# Altium PCB RFID-Project-PCB.PcbDoc
Units mm, origin at the board's own origin, x right, y up, seen from the top; angles counter-clockwise.
Board outline 152.4 x 101.6 mm, 2 copper layers (Top Layer, Bottom Layer); 83 components, 54 nets, 278 pads, 0 vias.
Unrouted connection lines stored in the file: 173.
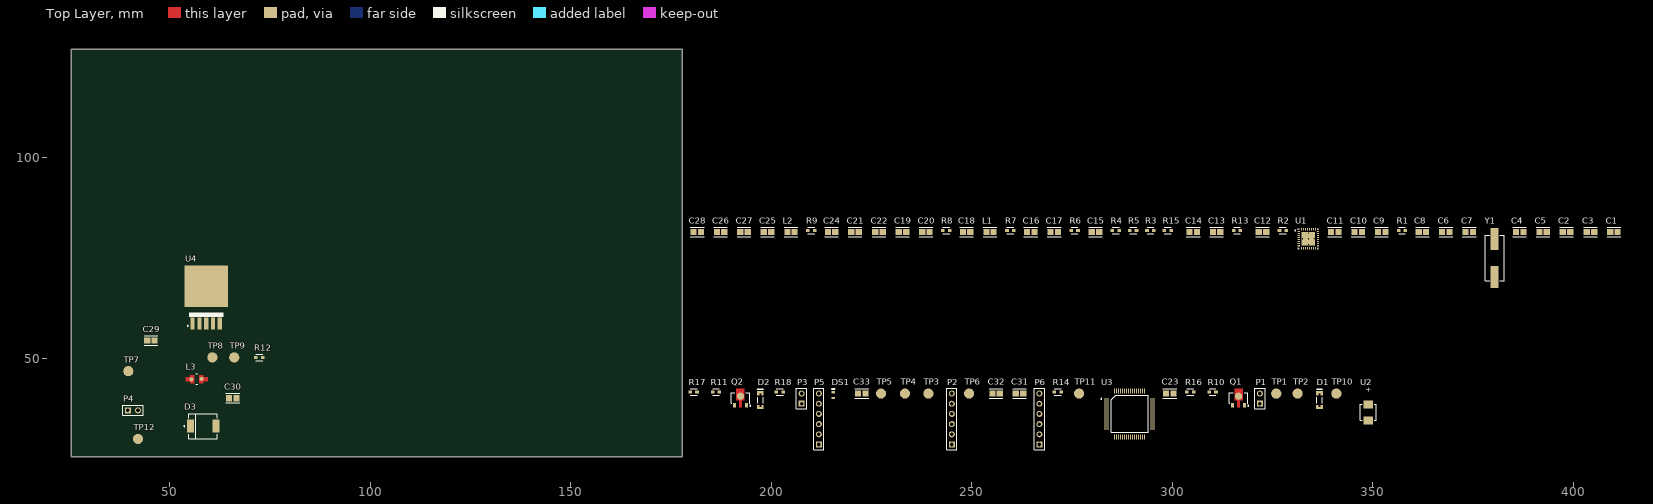
[diagram p0: Top Layer view]
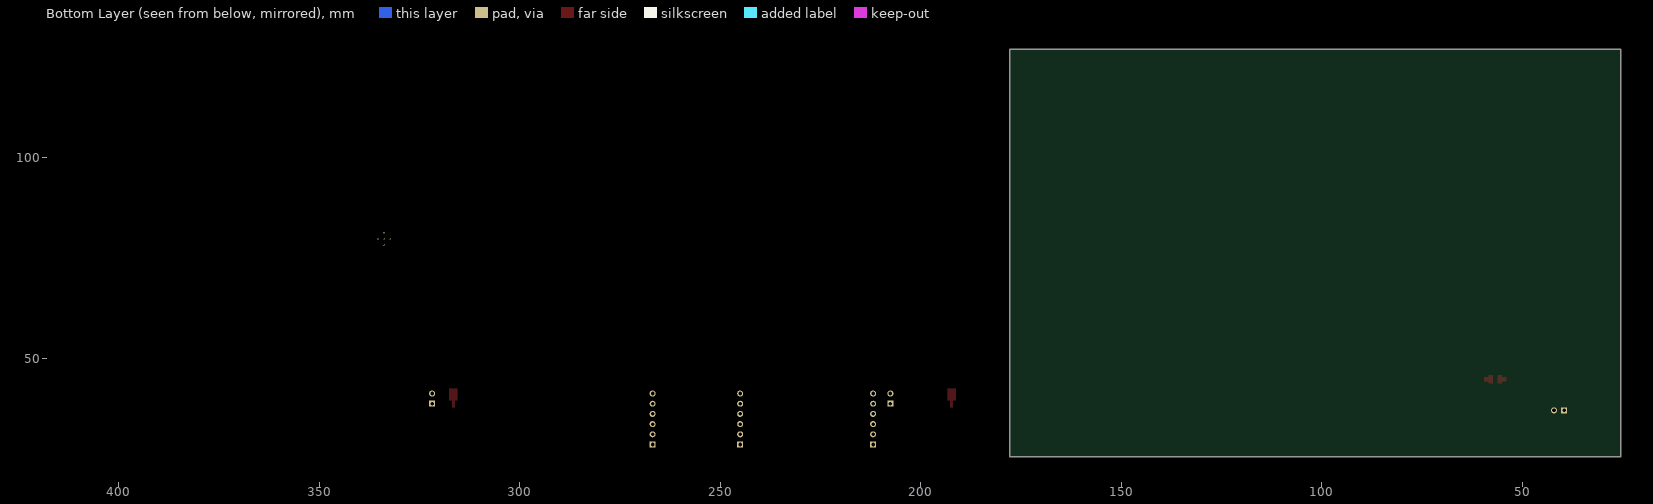
[diagram p1: Bottom Layer view, seen from below]

## Layer stack, top to bottom
Top Solder: solder mask 0.0102, Solder Resist, Dk 3.5
Top Layer: signal copper 0.0356
Dielectric 1: dielectric 0.32, FR-4, Dk 4.8
Bottom Layer: signal copper 0.0356
Bottom Solder: solder mask 0.0102, Solder Resist, Dk 3.5

## Board outline
25.4,25.4 177.8,25.4 177.8,127 25.4,127

## Design rules (kind name [scope] priority, off if disabled: settings)
Clearance [All] p1: gap=0.254 ignorepadtopadclearanceinfootprint=FALSE except(0: Arc-Hole Track-Hole SMDPad-Hole THPad-Hole Via-Hole Fill-Hole Poly-Hole Region-Hole Text-Hole; 0.125: Arc-Arc Arc-Track Arc-SMDPad Arc-THPad Track-Track Track-SMDPad Track-THPad SMDPad-SMDPad SMDPad-THPad; 0.15: Arc-Fill Arc-Poly Arc-Region Track-Fill Track-Poly Track-Region)
PolygonConnect [All] p1: connectstyle=Relief reliefconductorwidth=0.254 reliefentries=4 polygonreliefangle="90 Angle" airgapwidth=0.254
RoomDefinition MCU [InComponentClass('MCU')] p1: confinementstyle=ConfineIn formatcopy=TRUE lockcomponents=FALSE outline 178.943,26.924 351.282,26.924 351.282,45.212 178.943,45.212
RoomDefinition RFID [InComponentClass('RFID')] p2: confinementstyle=ConfineIn formatcopy=TRUE lockcomponents=FALSE outline 178.943,66.929 412.623,66.929 412.623,85.471 178.943,85.471
RoutingVias [All] p1: holewidth=0.711 width=1.27 viastyle="Through Hole" minholewidth=0.711 minwidth=1.27 maxholewidth=0.711 maxwidth=1.27
SolderMaskExpansion [All] p1: expansion=0.102 istentingtop=FALSE
Width [All] p1: maxlimit=0.254 minlimit=0.254 preferedwidth=0.254
30 further rules are at their usual default settings.

## Classes and differential pairs
component class RFID: C1 C2 C3 C4 C5 C6 C7 C8 C9 C10 C11 C12 C13 C14 C15 C16 C17 C18 C19 C20 C21 C22 C24 C25 C26 C27 C28 L1 L2 R1 R2 R3 R4 R5 R6 R7 R8 R9 R13 R15 U1 Y1
component class Power: C29 C30 D3 L3 P4 R12 TP7 TP8 TP9 TP12 U4
component class MCU: C23 C31 C32 C33 D1 D2 DS1 P1 P2 P3 P5 P6 Q1 Q2 R10 R11 R14 R16 R17 R18 TP1 TP2 TP3 TP4 TP5 TP6 TP10 TP11 U2 U3

## Components (designator, comment, footprint, x,y, rotation, side; value= is the part's Value field where it differs from the comment)
C1 "10nF" FP-GCJ21B-0_3-IPC_A 410.083,81.407 r0 top
C2 "2.2uF" FP-GCJ21B-0_3-IPC_A 398.272,81.407 r0 top
C3 "27pF" FP-GCJ21B-0_3-IPC_A 404.241,81.407 r0 top
C4 "10nF" FP-GCJ21B-0_3-IPC_A 386.588,81.407 r0 top
C5 "10nF" FP-GCJ21B-0_3-IPC_A 392.43,81.407 r0 top
C6 "27pF" FP-GCJ21B-0_3-IPC_A 368.173,81.407 r0 top
C7 "10nF" FP-GCJ21B-0_3-IPC_A 374.015,81.407 r0 top
C8 "10nF" FP-GCJ21B-0_3-IPC_A 362.331,81.407 r0 top
C9 "2.2uF" FP-GCJ21B-0_3-IPC_A 352.171,81.407 r0 top
C10 "2.2uF" FP-GCJ21B-0_3-IPC_A 346.329,81.407 r0 top
C11 "0.1uF" FP-GCJ21B-0_3-IPC_A 340.487,81.407 r0 top
C12 "10nF" FP-GCJ21B-0_3-IPC_A 322.453,81.407 r0 top
C13 "2.2uF" FP-GCJ21B-0_3-IPC_A 311.023,81.407 r0 top
C14 "10nF" FP-GCJ21B-0_3-IPC_A 305.181,81.407 r0 top
C15 "2.2uF" FP-GCJ21B-0_3-IPC_A 280.797,81.407 r0 top
C16 "1500pF" FP-GCJ21B-0_3-IPC_A 264.668,81.407 r0 top
C17 "1500pF" FP-GCJ21B-0_3-IPC_A 270.51,81.407 r0 top
C18 "47pF" FP-GCJ21B-0_3-IPC_A 248.666,81.407 r0 top
C19 "1200pF" FP-GCJ21B-0_3-IPC_A 232.664,81.407 r0 top
C20 "1200pF" FP-GCJ21B-0_3-IPC_A 238.506,81.407 r0 top
C21 "680pF" FP-GCJ21B-0_3-IPC_A 220.853,81.407 r0 top
C22 "10pF" FP-GCJ21B-0_3-IPC_A 226.822,81.407 r0 top
C23 "100nF" FP-GCJ21B-0_3-IPC_A 299.339,41.148 r0 top
C24 "56pF" FP-GCJ21B-0_3-IPC_A 215.011,81.407 r0 top
C25 "10pF" FP-GCJ21B-0_3-IPC_A 199.009,81.407 r0 top
C26 "220pF" FP-GCJ21B-0_3-IPC_A 187.325,81.407 r0 top
C27 "680pF" FP-GCJ21B-0_3-IPC_A 193.167,81.407 r0 top
C28 "100pF" FP-GCJ21B-0_3-IPC_A 181.483,81.407 r0 top
C29 "100uF" FP-GCJ21B-0_3-IPC_A 45.248,54.356 r180 top
C30 "1000uF" FP-GCJ21B-0_3-IPC_A 65.659,40.005 r0 top
C31 "100nF" FP-GCJ21B-0_3-IPC_A 261.874,41.148 r0 top
C32 "100nF" FP-GCJ21B-0_3-IPC_A 256.032,41.148 r0 top
C33 "100nF" FP-GCJ21B-0_3-IPC_A 222.504,41.148 r0 top
D1 "LL4148" FAIR-SOD80-2_V 336.677,39.497 r90 top
D2 "LL4148" FAIR-SOD80-2_V 197.231,39.497 r90 top
D3 "SS34-E3/57T" FP-95402-MFG 58.293,33.02 r0 top
DS1 "TLMS1000-GS08" VISH-TLMS1000_V 215.392,40.767 r90 top
L1 "LQM21NNR33K10D" FP-LQM21DN_00-IPC_A 254.508,81.407 r0 top
L2 "LQM21NNR33K10D" FP-LQM21DN_00-IPC_A 204.851,81.407 r0 top
L3 "LQH32CN101K23L" FP-LQH32CH_23-MFG 56.684,44.766 r0 top
P1 "Header 2" HDR1X2 321.818,38.608 r90 top
P2 "Header 6" HDR1X6 244.983,28.448 r90 top
P3 "Header 2" HDR1X2 207.518,38.608 r90 top
P4 "Header 2" HDR1X2 39.497,36.957 r0 top
P5 "Header 6" HDR1X6 211.836,28.448 r90 top
P6 "Header 6" HDR1X6 266.827,28.448 r90 top
Q1 "PBHV8115X,115" FP-SOT89-MFG 316.484,40.005 r0 top
Q2 "PBHV8115X,115" FP-SOT89-MFG 192.278,40.005 r0 top
R1 "10k" FP-AC0603-MFG 357.251,81.788 r0 top value=60.4Ω
R2 "100" FP-AC0603-MFG 327.533,81.788 r0 top value=60.4Ω
R3 "1k" FP-AC0603-MFG 294.513,81.788 r0 top value=60.4Ω
R4 "1k" FP-AC0603-MFG 285.877,81.788 r0 top value=60.4Ω
R5 "10k" FP-AC0603-MFG 290.195,81.788 r0 top value=60.4Ω
R6 "10k" FP-AC0603-MFG 275.59,81.788 r0 top value=60.4Ω
R7 "1k" FP-AC0603-MFG 259.588,81.788 r0 top value=60.4Ω
R8 "0" FP-AC0603-MFG 243.586,81.788 r0 top value=60.4Ω
R9 "1k" FP-AC0603-MFG 209.931,81.788 r0 top value=60.4Ω
R10 "220" FP-AC0603-MFG 310.007,41.529 r0 top value=60.4Ω
R11 "220" FP-AC0603-MFG 186.182,41.529 r0 top value=60.4Ω
R12 "0" FP-AC0603-MFG 72.263,50.165 r0 top value=60.4Ω
R13 "0" FP-AC0603-MFG 316.103,81.788 r0 top value=60.4Ω
R14 "0" FP-AC0603-MFG 271.399,41.529 r0 top value=60.4Ω
R15 "100k" FP-AC0603-MFG 298.831,81.788 r0 top value=60.4Ω
R16 "100k" FP-AC0603-MFG 304.419,41.529 r0 top value=60.4Ω
R17 "100k" FP-AC0603-MFG 180.594,41.529 r0 top value=60.4Ω
R18 "1K" FP-AC0603-MFG 202.057,41.529 r0 top value=60.4Ω
TP1 "testpoint" Testpoint 325.882,41.148 r0 top
TP2 "testpoint" Testpoint 331.216,41.148 r0 top
TP3 "testpoint" Testpoint 239.141,41.148 r0 top
TP4 "testpoint" Testpoint 233.299,41.148 r0 top
TP5 "testpoint" Testpoint 227.33,41.148 r0 top
TP6 "testpoint" Testpoint 249.301,41.148 r0 top
TP7 "testpoint" Testpoint 39.624,46.736 r0 top
TP8 "testpoint" Testpoint 60.579,50.165 r0 top
TP9 "testpoint" Testpoint 66.04,50.165 r0 top
TP10 "testpoint" Testpoint 340.868,41.148 r90 top
TP11 "testpoint" Testpoint 276.733,41.148 r90 top
TP12 "testpoint" Testpoint 42.037,29.845 r90 top
U1 "TRF7960RHBT" IC_ADS125H01IRHBT 333.883,79.756 r0 top
U2 "Buzzer" CUI_CMT-4023S-SMT-TR 348.869,36.449 r90 top
U3 "STM32L451RCT6" LQFP-64 289.306,36.068 r0 top
U4 "LM2576D2TR4-3.3G" D2PAK-5 59.055,63.119 r90 top
Y1 "ECS-135.600-CDX-0374" XTAL_ECS-135.600-CDX-0374 380.365,74.93 r90 top

## Footprints (in the part's own frame and the unit in brackets; to place one, negate y for a bottom-side part, rotate by r counter-clockwise, add the part's x,y. Pads: shape width x height; smd on the part's side, far side on the other; paste and mask are expansions set on the pad)
CUI_CMT-4023S-SMT-TR [mm]
  rect 2x2.4 smd: N(-2,0) P(2,0)
  silkscreen extent -2,-2 2,2, body extent -2,-2 2,2, height 2
D2PAK-5 [mil]
  rect 118.11x42 smd: 1(-178,134) 2(-178,67) 3(-178,0) 4(-178,-67) 5(-178,-134)
  rect 409.84x425.2 smd: 6(189.37,0)
  silkscreen extent -205,-167 -74,185, body extent -159,-200 400,200, height 180
FAIR-SOD80-2_V [mm] "SOD, 2-Leads, Body 3.45x1.4mm"
  rect 0.6x1.65 smd: 1(-1.95,0) 2(1.95,0)
  rect 1.1x0.575 smd: 1(-1.7,-0.537) 1(-1.7,0.537) 2(1.7,-0.537) 2(1.7,0.537)
  silkscreen extent -0.75,-0.7 2.75,0.7, body extent -1.73,-0.7 1.73,0.7, height 2.1
FP-95402-MFG [mm]
  rect 1.72x3.2 smd paste+0 mask+0: 1(-3.205,0) 2(3.205,0)
  silkscreen extent -4.82,-3.11 3.55,3.11, body extent -4.17,-3.21 4.17,3.21, height 0.25
FP-AC0603-MFG [mm]
  rect 0.9x0.8 smd paste+0 mask+0: 1(-0.85,0) 2(0.85,0)
  silkscreen extent -0.85,-0.82 0.85,0.82, body extent -1.4,-0.55 1.4,0.55, height 0.25
FP-GCJ21B-0_3-IPC_A [mm]
  rect 1.553x1.556 smd paste+0 mask+0: 1(-0.925,0) 2(0.925,0)
  silkscreen extent -1.7,-1.18 1.7,1.18, body extent -2.2,-1.28 2.2,1.28, height 0.25
FP-LQH32CH_23-MFG [mm]
  round 0.995 smd paste+0 mask+0: 1(-1.312,-0.062)
  round 1.012 smd paste+0 mask+0: 2(1.212,0.062)
  Top Layer region: 0.65,-1 0.65,1 1.65,1 1.65,0.5 2.75,0.5 2.75,-0.5 1.65,-0.5 1.65,-1
  Top Layer region: -1.65,-1 -1.65,-0.5 -2.75,-0.5 -2.75,0.5 -1.65,0.5 -1.65,1 -0.65,1 -0.65,-1
  silkscreen extent -0.27,-1.35 0.27,1.35, body extent -2.85,-1.45 2.85,1.45, height 0.25
FP-LQM21DN_00-IPC_A [mm]
  rect 1.554x1.556 smd paste+0 mask+0: 1(-0.876,0) 2(0.876,0)
  silkscreen extent -1.65,-1.18 1.65,1.18, body extent -2.15,-1.28 2.15,1.28, height 0.25
FP-SOT89-MFG [mm]
  rect 0.7x1.1 smd paste-1000 mask+0: 1(1.5,-1.75) 3(-1.5,-1.75)
  round 1.8 smd paste-1000 mask+0: 2(0,0.478)
  Top Layer region: -1,2.3 1,2.3 1,-0.5 0.35,-0.5 0.35,-2.3 -0.35,-2.3 -0.35,-0.5 -1,-0.5
  silkscreen extent -2.3,-2.05 2.55,1.3, body extent -2.4,-2.42 2.4,2.42, height 0.25
HDR1X2 [mm] "Connector; Header; 2 Position"
  rect 1.5x1.5 hole 0.9: 1(0,0)
  round 1.5 hole 0.9: 2(2.54,0)
  silkscreen extent -1.27,-1.27 3.81,1.27
HDR1X6 [mm] "Connector; Header; 6 Position"
  rect 1.5x1.5 hole 0.9: 1(0,0)
  round 1.5 hole 0.9: 2(2.54,0) 3(5.08,0) 4(7.62,0) 5(10.16,0) 6(12.7,0)
  silkscreen extent -1.27,-1.27 13.97,1.27
IC_ADS125H01IRHBT [mm]
  rrect25% 0.6x0.25 smd mask+0: 1(-2.4,1.75) 2(-2.4,1.25) 3(-2.4,0.75) 4(-2.4,0.25) 5(-2.4,-0.25) 6(-2.4,-0.75) 7(-2.4,-1.25) 8(-2.4,-1.75) 17(2.4,-1.75) 18(2.4,-1.25) 19(2.4,-0.75) 20(2.4,-0.25) 21(2.4,0.25) 22(2.4,0.75) 23(2.4,1.25) 24(2.4,1.75)
  rrect25% 0.25x0.6 smd mask+0: 9(-1.75,-2.4) 10(-1.25,-2.4) 11(-0.75,-2.4) 12(-0.25,-2.4) 13(0.25,-2.4) 14(0.75,-2.4) 15(1.25,-2.4) 16(1.75,-2.4) 25(1.75,2.4) 26(1.25,2.4) 27(0.75,2.4) 28(0.25,2.4) 29(-0.25,2.4) 30(-0.75,2.4) 31(-1.25,2.4) 32(-1.75,2.4)
  rect 3.45x3.45 smd paste-3 mask+0: 33(0,0)
  round 0.4 hole 0.2 mask+0: 34(0,0) 35(0,1.475) 36(-1.475,0) 37(0,-1.475) 38(1.475,0)
  silkscreen extent -3.39,-2.5 2.5,2.5, body extent -2.5,-2.5 2.5,2.5, height 1
LQFP-64 [mm]
  rect 1.2x0.3 smd mask+0.05: 1(-5.75,3.75) 2(-5.75,3.25) 3(-5.75,2.75) 4(-5.75,2.25) 5(-5.75,1.75) 6(-5.75,1.25) 7(-5.75,0.75) 8(-5.75,0.25) 9(-5.75,-0.25) 10(-5.75,-0.75) 11(-5.75,-1.25) 12(-5.75,-1.75) 13(-5.75,-2.25) 14(-5.75,-2.75) 15(-5.75,-3.25) 16(-5.75,-3.75) 33(5.75,-3.75) 34(5.75,-3.25) 35(5.75,-2.75) 36(5.75,-2.25) 37(5.75,-1.75) 38(5.75,-1.25) 39(5.75,-0.75) 40(5.75,-0.25) 41(5.75,0.25) 42(5.75,0.75) 43(5.75,1.25) 44(5.75,1.75) 45(5.75,2.25) 46(5.75,2.75) 47(5.75,3.25) 48(5.75,3.75)
  rect 0.3x1.2 smd mask+0.05: 17(-3.75,-5.75) 18(-3.25,-5.75) 19(-2.75,-5.75) 20(-2.25,-5.75) 21(-1.75,-5.75) 22(-1.25,-5.75) 23(-0.75,-5.75) 24(-0.25,-5.75) 25(0.25,-5.75) 26(0.75,-5.75) 27(1.25,-5.75) 28(1.75,-5.75) 29(2.25,-5.75) 30(2.75,-5.75) 31(3.25,-5.75) 32(3.75,-5.75) 49(3.75,5.75) 50(3.25,5.75) 51(2.75,5.75) 52(2.25,5.75) 53(1.75,5.75) 54(1.25,5.75) 55(0.75,5.75) 56(0.25,5.75) 57(-0.25,5.75) 58(-0.75,5.75) 59(-1.25,5.75) 60(-1.75,5.75) 61(-2.25,5.75) 62(-2.75,5.75) 63(-3.25,5.75) 64(-3.75,5.75)
  silkscreen extent -7.15,-4.61 4.61,4.61, body extent -6,-6 6,6, height 1.46
Testpoint [mm]
  round 2.54 smd: 1(0,0)
VISH-TLMS1000_V [mm] "SMD, 2-Leads, Body 0.8x1.6mm"
  rect 0.6x0.8 smd: 1(-0.725,0) 2(0.725,0)
  silkscreen extent 1.52,-0.4 1.52,0.4, body extent -0.8,-0.4 0.8,0.4, height 0.65
XTAL_ECS-135.600-CDX-0374 [mm]
  rect 5.5x2 smd: 1(-4.75,0) 2(4.75,0)
  silkscreen extent -5.7,-2.4 5.7,2.4

## Part data
C1 C3 C4 C5 C6 C7 C8 C11 C12 C14 C16 C17 C18 C19 C20 C21 C22 C23 C24 C25 C26 C27 C28 C29 C30 C31 C32 C33: library part CMP-2007-03210-2, "Multilayer Ceramic Capacitors MLCC - SMD/SMT 0805 2.2uF 10%, 16VDC,  X7R 15%", Capacitance=2.2uF, Case Code (Imperial)=0805, Case Code (Metric)=2012, Dielectric=X7R, Max Operating Temperature=125°C, Min Operating Temperature=-55°C, Package Quantity=1, Ratings=AEC-Q200, Tolerance=10%, Voltage Rating=16V, Case/Package=0805, Depth=1.25mm, Features="Soft Termination", Height=1.25mm, Lead Free="Lead Free", Length=2mm, Mount="Surface Mount", Packaging="Tape and Reel", Radiation Hardening=No, Termination=SMD/SMT, Thickness=0.057inch, Voltage Rating (DC)=16V, Width=0.049inch
C2 C9 C10 C13 C15: library part CMP-2007-03210-2, "Multilayer Ceramic Capacitors MLCC - SMD/SMT 0805 2.2uF 10%, 16VDC,  X7R 15%", Case Code (Imperial)=0805, Case Code (Metric)=2012, Dielectric=X7R, Max Operating Temperature=125°C, Min Operating Temperature=-55°C, Package Quantity=1, Ratings=AEC-Q200, Tolerance=10%, Voltage Rating=16V, Capacitance=2.2uF, Case/Package=0805, Depth=1.25mm, Features="Soft Termination", Height=1.25mm, Lead Free="Lead Free", Length=2mm, Mount="Surface Mount", Packaging="Tape and Reel", Radiation Hardening=No, Termination=SMD/SMT, Thickness=0.057inch, Voltage Rating (DC)=16V, Width=0.049inch
D1 D2: library part CMP-2000-05115-2, "Small Signal Diode, 100 V, 0.2 A, -55 to 175 degC, 2-Pin SOD80, RoHS, Tape and Reel", Average Forward Current-Max=200mA, Forward Voltage=1V, Manufacturer=Fairchild, Power Dissipation=500mW, Reverse Voltage-Max [Vrrm]=100V, Datasheet URL=https://www.fairchildsemi.com/datasheets/LL/LL4148.pdf, Datasheet Version="Rev. 1.8, 01/2016", Manufacturer URL=https://www.fairchildsemi.com/, Reverse Recovery Time-Max=1ns
D3: library part CMP-02539-000012-1, "DIODE SCHOTTKY 40V 3A DO214AB", Forward Current=3A, Manufacturer=Vishay, Max Junction Temp=+150°C, Max Repetitive Reverse Voltage=40V, Max Surge Forward Current=100A, Package=95402, Peak Reverse Current=0.5mA, Temperature="-55°C to +150°C", Temperature Range Low=-55°C, Automotive=No, Category=Diode, ComponentLink2Description=Datasheet, ComponentLink2URL=http://www.vishay.com/docs/88751/ss32.pdf, Device Class L1="Discrete Semiconductors", Device Class L2=Diodes, Device Class L3="Schottky Diodes", Digikey Description="DIODE SCHOTTKY 40V 3A DO214AB", Footprint Url=http://www.vishay.com/docs/95402/smc.pdf, Height=2.62mm, Lead Free=Yes, Manufacturer Part Number=SS34-E3/57T, Mouser Description="Schottky Diodes & Rectifiers 3.0 Amp 40 Volt", Octopart=https://octopart.com/ss34-e3%2F57t-vishay-39552907, RoHS=TRUE, Standoff Height=0mm, Temperature Range High=+150°C
DS1: library part CMP-2000-07254-1, "Low Current LED, 40 mW, 1.8 V, -40 to 100 degC, 2-Pin SMD (0603), RoHS, Tape and Reel", Forward Current If=2mA, Forward Voltage=1.8V, LED Colour=Red, Manufacturer=Vishay, Package Description="2-Pin Surface Mount Device, Body 1.6 x 0.8 mm", Package Reference=TLMS1000, Automotive Qualification Standard=AEC-Q100, Bulb Size=1.6mmx0.8mm, Datasheet URL=https://datasheet.ciiva.com/5798/1698881-5798337.pdf, Datasheet Version="Rev. 1.7, 02/2011", LED Mounting=SMD, Lens Shape=Rectangular, Luminous Intensity=4mcd, Manufacturer URL=http://www.vishay.com/, Mounting Technology=SurfaceMount, MSL=MSL2-1year, Packaging=CutTape, Product Range=-, SVHC=ToBeAdvised, Viewing Angle=80°, Wavelength Typ=636nm
L1 L2: library part CMP-06042-017039-1, "Multilayer Type Inductor for General Circuits, 0805 (2012), 0.33μH, 10%, 0.48Ω, 250mA", Case Code (Imperial)=0805, Case Code (Metric)=2012, Current Rating=250mA, DC Resistance (DCR)=480mR, Inductance=330nH, Inductance Tolerance=10%, Max Operating Temperature=85°C, Min Operating Temperature=-40°C, Package Quantity=4000, Self Resonant Frequency=180MHz, Test Frequency=25MHz, Case/Package=0805, Core Material=Ferrite, DC Current=250mA, Depth=1.45mm, Height=0.85mm, Height - Seated (Max)=0.041inch, Length=2mm, Max DC Current=250mA, Military Standard=Not, Mount="Surface Mount", Number of Pins=2, Packaging="Tape and Reel", Q Factor=20, Radiation Hardening=No, REACH SVHC="No SVHC", RoHS Compliant=Yes, Series=LQM21N, Shielding=Shielded, Termination=SMD/SMT, Tolerance=10%, Width=0.049inch
L3: library part CMP-06042-006648-2, "Wire Wound Ferrite Inductor for Power Lines 100μH ±10% 4.55Ω 100mA 1210", Case Code (Imperial)=1210, Case Code (Metric)=3225, Current=1.1A, Current Rating=100mA, DC Resistance (DCR)=3.5R, Frequency=10MHz, Inductance=100uH, Inductance Tolerance=10%, Inductor Type=Wirewound, Max Operating Temperature=85°C, Min Operating Temperature=-40°C, Package Quantity=2000, Test Frequency=1MHz, Case/Package=1210, Core Material=Ferrite, DC Current=100mA, Depth=2.7mm, Height=2mm, Lead Free="Lead Free", Length=3.2mm, Max DC Current=100mA, Military Standard=Not, Mount="Surface Mount", Number of Pins=2, Packaging="Tape and Reel", Q Factor=40, Radiation Hardening=No, Rated Current-Max=100mA, REACH SVHC="No SVHC", RoHS Compliant=Yes, Self Resonant Frequency=10MHz, Series=LQH32C_33, Shielding=Unshielded, Termination=SMD/SMT, Tolerance=10%, Weight=0.002116oz, Width=2.5mm
P1 P3 P4: "Header, 2-Pin", LatestRevisionDate=17-Jul-2002, LatestRevisionNote="Re-released for DXP Platform.", Publisher="Altium Limited"
P2 P5 P6: "Header, 6-Pin", LatestRevisionDate=17-Jul-2002, LatestRevisionNote="Re-released for DXP Platform.", Publisher="Altium Limited"
Q1 Q2: library part CMP-14406-000018-1, "TRANS NPN 150V 1A SOT89", Ambient Temperature Range High=+150°C, Ambient Temperature Range Low=-55°C, Collector Base Voltage=400V, Collector Emitter Saturation Voltage=33mV, Collector Emitter Voltage=150V, Emitter Base Voltage=6V, Manufacturer=Nexperia, Max Collector Current=1A, Package=SOT89, Power Dissipation=0.52W, Temperature="to +150°C", Automotive=Yes, Automotive Grade="Grade 0", Category=Trans, ComponentLink2Description=Datasheet, ComponentLink2URL=https://assets.nexperia.com/documents/data-sheet/PBHV8115X.pdf, Delay Time Td=7ns, Device Class L1="Discrete Semiconductors", Device Class L2=Transistors, Device Class L3=BJTs, Digikey Description="TRANS NPN 150V 1A SOT89", Fall Time Tf=700ns, Footprint Url=https://assets.nexperia.com/documents/outline-drawing/SOT89.pdf, Gain Bandwidth Product=30MHz, Height=1.6mm, Hfe Min=10, Hfe Testic=1A, Hfe Testvce=10V, Lead Free=Yes, Manufacturer Part Number=PBHV8115X,115, Max Junction Temp=+150°C, Number Of Elements=1, Number Of Npn=1, Octopart=https://octopart.com/pbhv8115x%2C115-nexperia-78740688, Rise Time Tr=565ns, RoHS=TRUE, Rthja Max=240K/W, Storage Time Ts=1530ns, Temperature Range High=+150°C
R1 R2 R3 R4 R5 R6 R7 R8 R9 R10 R11 R12 R13 R14 R15 R16 R17 R18: library part CMP-03412-025180-1, "RES SMD 60.4 OHM 1% 1/10W 0603", Manufacturer=Yageo, Manufacturer Part Number=AC0603FR-0760R4L, Package=AC0603, Power Rating=0.1W, Resistance=60.4Ω, Temperature="-55°C to +155°C", Temperature Range High=+155°C, Temperature Range Low=-55°C, Tolerance=0.01, Voltage Rating=75V, Automotive=Yes, Automotive Grade="Grade 0", Category=Res, ComponentLink2Description=Datasheet, ComponentLink2URL=http://www.yageo.com/NewPortal/yageodocoutput?fileName=/pdf/R-Chip/PYu-AC_51_RoHS_L_6.pdf, Composition="Thick Film", Device Class L1="Passive Components", Device Class L2=Resistors, Device Class L3="Chip SMD Resistors", Digikey Description="RES SMD 60.4 OHM 1% 1/10W 0603", Footprint Url=http://www.yageo.com/exep/pages/download/literatures/PYu-R_Mount_9.pdf, Height=0.55mm, Ipc Land Pattern Name=RESC16080X45, Lead Free=Yes, Mouser Description="Res Thick Film 0603 60.4 Ohm 1% 0.1W(1/10W) ±100ppm/C Epoxy Pad SMD Automotive T/R", Octopart=https://octopart.com/ac0603fr-0760r4l-yageo-71367350, RoHS=TRUE, Series=AC
U1: "TRF7960 Multi-Protocol Fully Integrated 13.56-MHz RFID Reader/Writer IC 32-VQFN -40 to 110"
U3: "MCU 32-bit STM32", Manufacturer=STMicroelectronics, Category=Microcontrollers, Manufacturer Part Number=STM32L451RCT6, RoHS=Yes
U4: "http://octopart.com/lm2576d2tr4-5g-on+semiconductor-46514222", Package=None, Availability=Unavailable, MP=LM2576D2TR4-3.3G, Price=None
Y1: Package=None, Availability=Unavailable, MP=ECS-135.600-CDX-0374, Price=None

## Nets (pads, with @x,y where several pads share a name; then routed paths per layer and width w, separated by ;. In a path a pad name is that pad's centre, name@x,y a point inside that pad or via, vN(x,y) a via of type N, cw(c..) or ccw(c..) an arc to the next point about the centre after c; other vN are vias at no path point)
12V: C29.2 D2.2 P3.1 P4.1 TP7.1 U4.1
BOOT0: R14.1 U3.60
BUCK_EN: R12.1 U3.2
"CLK (GPIO)": TP3.1 U1.26 U3.15
DVCC: C4.2 C5.2 C8.2 C10.2 C11.1 C23.2 C30.2 C31.1 C32.2 C33.1 D1.2 L3.2 P2.1 P5.2 R2.2 TP8.1 U1.2 U1.25 U3.13 U3.19 U3.32 U3.48 U3.64 U4.4
GND: C1.1 C2.1 C3.1 C4.1 C5.1 C6.2 C7.2 C8.1 C9.2 C10.1 C11.2 C12.1 C13.1 C14.1 C15.1 C20.2 C21.2 C23.1 C27.2 C28.2 C29.1 C30.1 C31.2 C32.1 C33.2 D3.2 P1.2 P2.3 P4.2 P5.3 P6.6 Q1.1 Q2.1 R1.1 R3.1 R4.1 R14.2 R15.1 R16.1 R17.1 R18.2 TP11.1 TP12.1 U1.6 U1.7 U1.10 U1.15 U1.17 U1.29 U3.12 U3.18 U3.31 U3.47 U3.63 U4.3
"Interrupt Capable GPIO": R7.2 U3.24
LOCK_CONTROL: R11.1 R17.2 TP2.1 U3.4
MISO: TP5.1 U1.23 U3.22
MOSI: TP4.1 U1.24 U3.23
NetC1_2: C1.2 C2.2 U1.1
NetC3_2: C3.2 U1.30 Y1.2
NetC6_1: C6.1 U1.31 Y1.1
NetC7_1: C7.1 C9.1 R2.1 R5.2 R6.2 U1.16 U1.32
NetC12_2: C12.2 C13.2 U1.3 U1.4
NetC14_2: C14.2 C15.2 U1.11
NetC16_1: C16.1 C17.1 L1.1
NetC16_2: C16.2 C17.2 U1.5
NetC18_1: C18.1 C22.2 R8.2
NetC18_2: C18.2 C22.1 C24.1 C24.2 R9.1 R9.2
NetC19_1: C19.1 C21.1 C25.2 L1.2 L2.1
NetC19_2: C19.2 C20.1 U1.8
NetC25_1: C25.1 C26.1 C28.1 L2.2 R8.1
NetC26_2: C26.2 C27.1 U1.9
NetD1_1: D1.1 Q1.2
NetD2_1: D2.1 P3.2 Q2.2
NetD3_1: D3.1 L3.1 U4.2
NetDS1_1: DS1.1 U3.33
NetDS1_2: DS1.2 R18.1
NetQ1_3: Q1.3 R10.2
NetQ2_3: Q2.3 R11.2
NetR3_2: R3.2 U1.12
NetR4_2: R4.2 U1.14
NetR5_1: R5.1 U1.19
NetR6_1: R6.1 U1.18
NetR7_1: R7.1 U1.13
NetR12_2: R12.2 TP9.1 U4.5
NetR13_1: R13.1 U1.27
NRST: P2.5 U3.7
PWM_BUZZER: R10.1 R16.2 TP6.1 U3.41
"Reader Pwr Enable (GPIO)": R1.2 R15.2 TP1.1 U1.28 U3.3
RX: P5.4 U3.52
"Slave Select (GPIO)": U1.21 U3.20
SYS_JTCK_SWCLK: P2.2 U3.49
SYS_JTDO-SWO: P2.6 U3.55
SYS_JTMS_SWDIO: P2.4 U3.46
TX: P5.5 U3.14
UNUSED_IO_1: P6.1 U3.40
UNUSED_IO_2: P6.2 U3.39
UNUSED_IO_3: P6.3 U3.38
UNUSED_IO_4: P6.4 U3.37
UNUSED_IO_5: P6.5 U3.36
VBAT: P1.1 TP10.1 U3.1
XIN: R13.2 U3.5
pads on no net: P5.1 P5.6 U1.20 U1.22 U1.33 U1.34 U1.35 U1.36 U1.37 U1.38 U2.N U2.P U3.6 U3.8 U3.9 U3.10 U3.11 U3.16 U3.17 U3.21 U3.25 U3.26 U3.27 U3.28 U3.29 U3.30 U3.34 U3.35 U3.42 U3.43 U3.44 U3.45 U3.50 U3.51 U3.53 U3.54 U3.56 U3.57 U3.58 U3.59 U3.61 U3.62 U4.6

## Text inside footprints (layer, text, board x,y; h text height)
U2: Top Overlay "+" at 349.449,41.363 h1.27 r90